# Altium PCB Adquisicion.PcbDoc
Units mm, origin at the board's own origin, x right, y up, seen from the top; angles counter-clockwise.
Board outline 77.6 x 32.51 mm, 2 copper layers (Top Layer, Bottom Layer); 30 components, 20 nets, 85 pads, 22 vias.
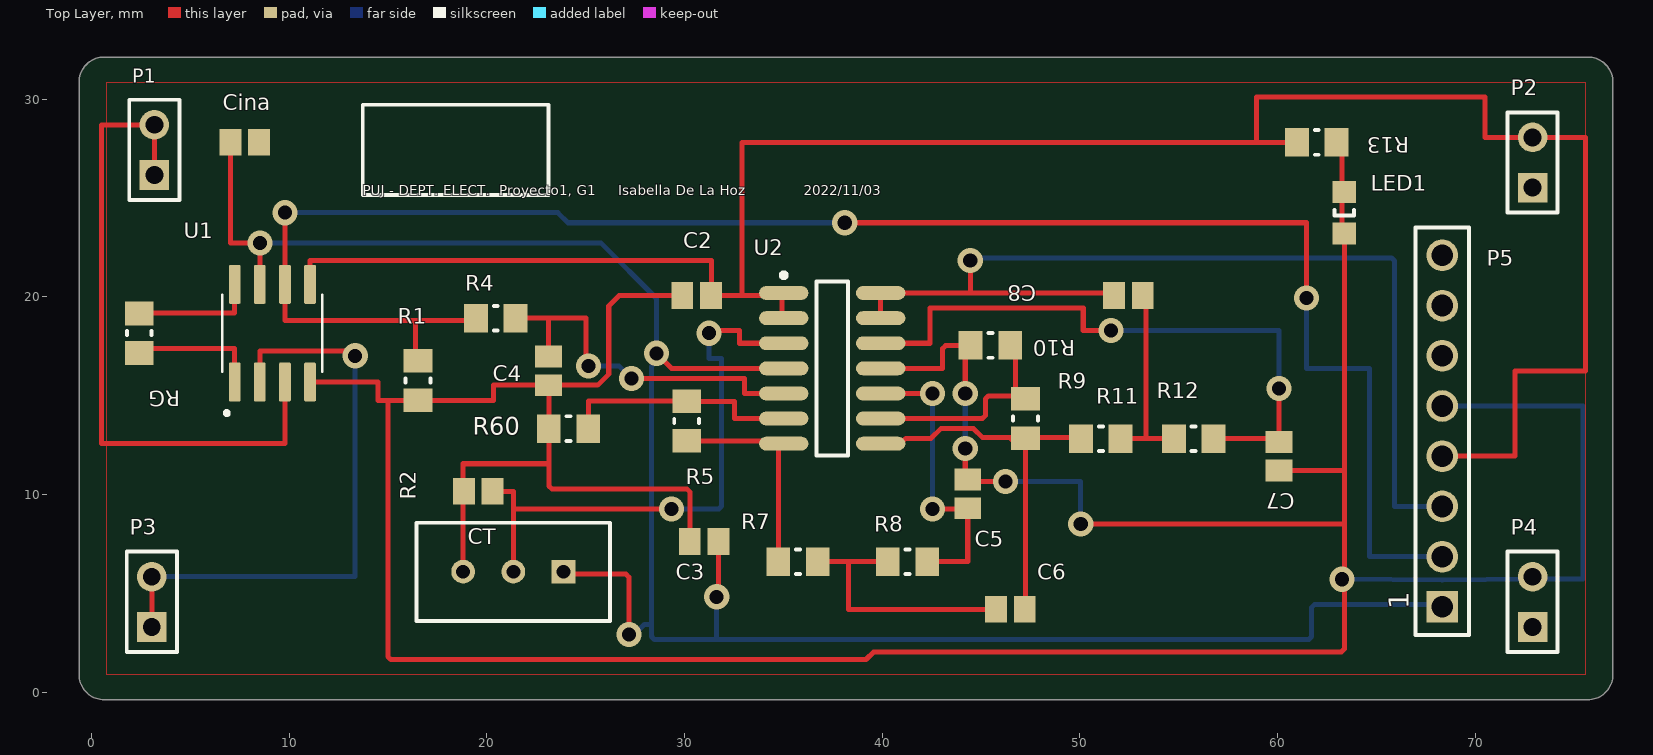
[diagram p0: Top Layer view]
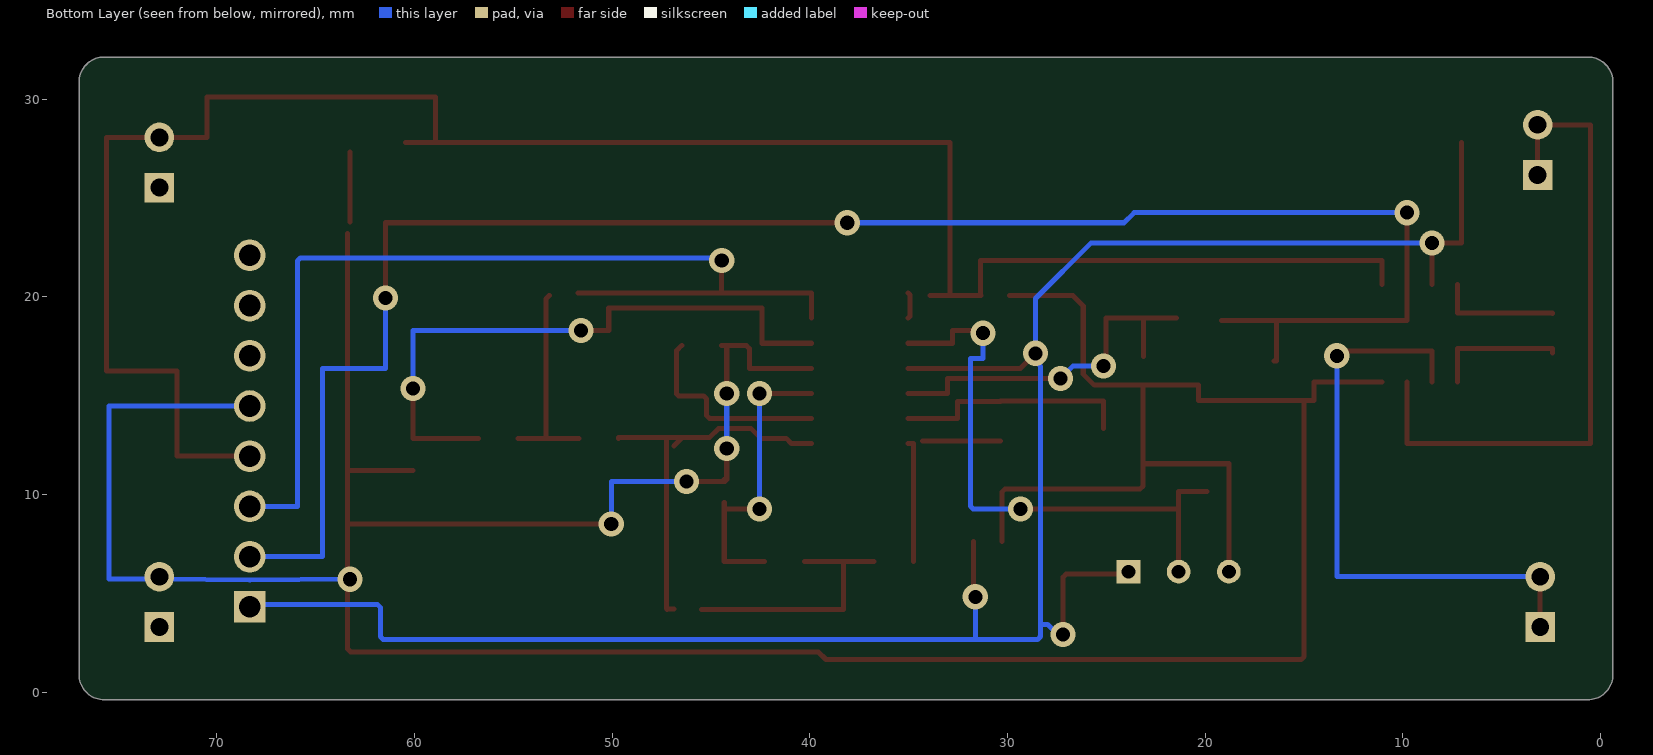
[diagram p1: Bottom Layer view, seen from below]
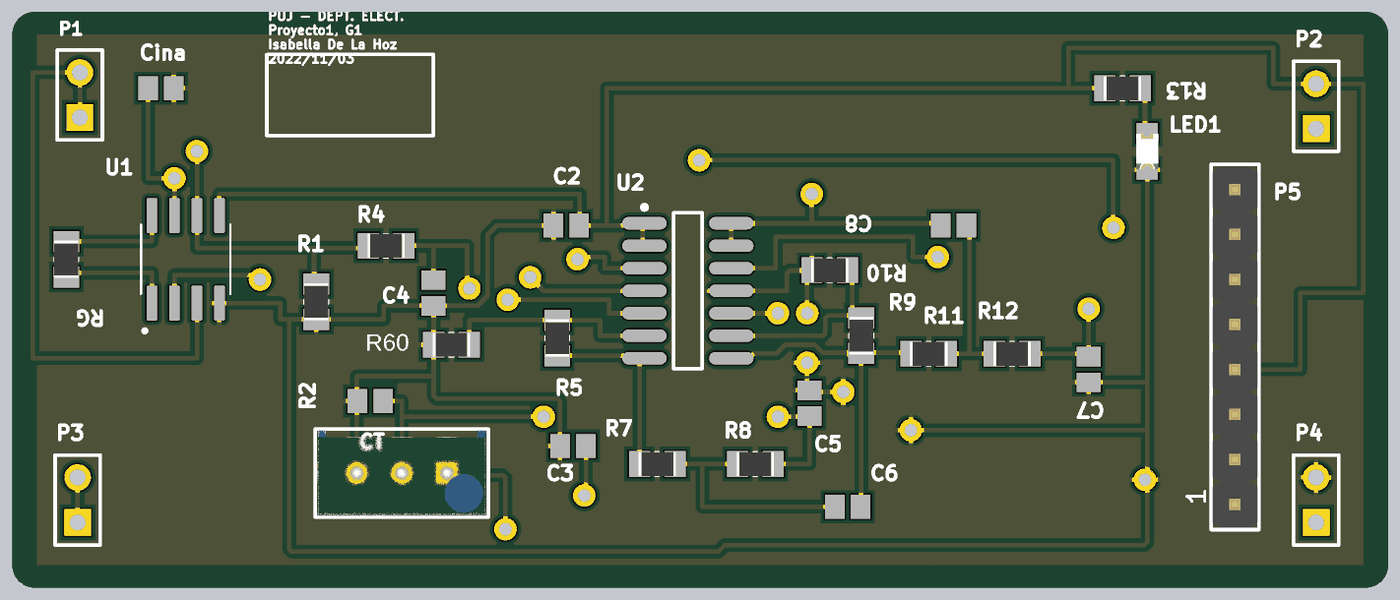
[diagram p2: 3D render of the assembled board from above, using the file's embedded part models]

## Layer stack, top to bottom
Top Solder: solder mask 0.0102, Solder Resist, Dk 3.5
Top Layer: signal copper 0.0356
Dielectric 1: dielectric 0.32, FR-4, Dk 4.8
Bottom Layer: signal copper 0.0356
Bottom Solder: solder mask 0.0102, Solder Resist, Dk 3.5

## Board outline
-0.635,0.889 -0.635,30.861 cw(c0.635,30.861) 0.635,32.131 75.692,32.131 cw(c75.692,30.861) 76.962,30.861 76.962,0.889 cw(c75.692,0.889) 75.692,-0.381 0.635,-0.381 cw(c0.635,0.889)

## Design rules (kind name [scope] priority, off if disabled: settings)
Clearance [All] p1: gap=0.254 ignorepadtopadclearanceinfootprint=FALSE except(0: Arc-Hole Track-Hole SMDPad-Hole THPad-Hole Via-Hole Fill-Hole Poly-Hole Region-Hole Text-Hole)
PolygonConnect [All] p1: connectstyle=Relief reliefconductorwidth=0.254 reliefentries=4 polygonreliefangle="90 Angle" airgapwidth=0.254
RoutingVias [All] p1: holewidth=0.711 width=1.27 viastyle="Through Hole" minholewidth=0.711 minwidth=1.27 maxholewidth=0.711 maxwidth=1.27
SolderMaskExpansion [All] p1: expansion=0.102 istentingtop=FALSE
Width [All] p1: maxlimit=0.254 minlimit=0.254 preferedwidth=0.254
30 further rules are at their usual default settings.

## Components (designator, comment, footprint, x,y, rotation, side; value= is the part's Value field where it differs from the comment)
C2 "VJ0805Y103JXBMT" CAPC2013X145X48LL20T23 30.607,20.066 r0 top
C3 "VJ0805Y103JXBMT" CAPC2013X145X48LL20T23 30.988,7.62 r0 top
C4 "VJ0805Y103JXBMT" CAPC2013X145X48LL20T23 23.114,16.256 r90 top
C5 "VJ0805Y103JXBMT" CAPC2013X145X48LL20T23 44.323,10.033 r270 top
C6 "VJ0805Y103JXBMT" CAPC2013X145X48LL20T23 46.482,4.191 r180 top
C7 "VJ0805Y103JXBMT" CAPC2013X145X48LL20T23 60.071,11.938 r270 top
C8 "VJ0805Y103JXBMT" CAPC2013X145X48LL20T23 52.451,20.066 r180 top
Cina "VJ0805Y103JXBMT" CAPC2013X145X48LL20T23 7.747,27.813 r180 top
CT "VJ0805Y103JXBMT" CAPC2013X145X48LL20T23 19.558,10.16 r0 top
LED1 "150080BS75000" 0805_A 63.373,24.255 r90 top
P1 "E+" HDR1X2 3.175,26.162 r90 top
P2 "VCC/2" HDR1X2 72.898,25.527 r90 top
P3 "VE-" HDR1X2 3.048,3.302 r90 top
P4 "Ground" HDR1X2 72.898,3.302 r90 top
P5 "61300811121" 61300811121 68.326,13.208 r90 top
R1 "RC0805JR-070RL" RESC2013X60X35ML10T20 16.51,15.764 r90 top
R2 "3296W-1-501LF" FP-3296W-MFG 21.336,6.091 r90 top
R4 "RC0805JR-070RL" RESC2013X60X35ML10T20 20.447,18.923 r0 top
R5 "RC0805JR-070RL" RESC2013X60X35ML10T20 30.099,13.716 r90 top
R7 "RC0805JR-070RL" RESC2013X60X35ML10T20 35.739,6.604 r0 top
R8 "RC0805JR-070RL" RESC2013X60X35ML10T20 41.275,6.604 r0 top
R9 "RC0805JR-070RL" RESC2013X60X35ML10T20 47.244,13.843 r90 top
R10 "RC0805JR-070RL" RESC2013X60X35ML10T20 45.466,17.545 r180 top
R11 "RC0805JR-070RL" RESC2013X60X35ML10T20 51.054,12.827 r0 top
R12 "RC0805JR-070RL" RESC2013X60X35ML10T20 55.753,12.827 r0 top
R13 "RC0805JR-070RL" RESC2013X60X35ML10T20 61.976,27.813 r180 top
R60 "RC0805JR-070RL" RESC2013X60X35ML10T20 24.13,13.335 r0 top
RG "RC0805JR-070RL" RESC2013X60X35ML10T20 2.413,18.161 r270 top
U1 "INA128U" SOIC127P599X175-8N 9.144,18.161 r90 top
U2 "MCP604-I/SL" SOIC-SL14_M 37.465,16.383 r0 top

## Footprints (in the part's own frame and the unit in brackets; to place one, negate y for a bottom-side part, rotate by r counter-clockwise, add the part's x,y. Pads: shape width x height; smd on the part's side, far side on the other; paste and mask are expansions set on the pad)
0805_A [mm] "Chip LED, 2-Leads, Body 2.0x1.3mm, IPC Medium Density"
  rect 1.1x1.2 smd: 1(-1.05,0) 2(1.05,0)
  silkscreen extent -0.15,-0.5 0.15,0.5, body extent -1,-0.62 1,0.63, height 0.68
61300811121 [mm] "Pin Header, pitch 2.54 mm, THT, Vertical, single row, 8p"
  rect 1.6x1.6 hole 1.1: 1(-8.89,0)
  round 1.6 hole 1.1: 2(-6.35,0) 3(-3.81,0) 4(-1.27,0) 5(1.27,0) 6(3.81,0) 7(6.35,0) 8(8.89,0)
  silkscreen extent -10.31,-1.35 10.31,1.35, body extent -10.16,-1.27 10.16,1.27, height 8.57
CAPC2013X145X48LL20T23 [mm] "Chip Capacitor, 2-Leads, Body 2.00x1.25mm, IPC High Density"
  rect 1.1x1.35 smd: 1(-0.725,0) 2(0.725,0)
  body extent -1.1,-0.72 1.1,0.72, height 1.45
FP-3296W-MFG [mm]
  rect 1.2x1.2 hole 0.7 paste-1000 mask+0: 1(0.005,-2.54)
  round 1.2 hole 0.7 paste-1000 mask+0: 2(0.005,0) 3(0.005,2.54)
  silkscreen extent -2.48,-4.89 2.48,4.89, body extent -2.58,-4.99 2.58,4.99, height 0.25
HDR1X2 [mm] "Connector; Header; 2 Position"
  rect 1.5x1.5 hole 0.9: 1(0,0)
  round 1.5 hole 0.9: 2(2.54,0)
  silkscreen extent -1.27,-1.27 3.81,1.27
RESC2013X60X35ML10T20 [mm] "Chip Resistor, 2-Leads, Body 2.1x1.35mm, IPC Low Density"
  rect 1.2x1.45 smd: 1(-1,0) 2(1,0)
  silkscreen extent -0.1,-0.62 0.1,0.62, body extent -1.05,-0.68 1.05,0.67, height 0.6
SOIC127P599X175-8N [mm]
  rrect25% 1.97x0.6 smd: 1(-2.47,1.905) 2(-2.47,0.635) 3(-2.47,-0.635) 4(-2.47,-1.905) 5(2.47,-1.905) 6(2.47,-0.635) 7(2.47,0.635) 8(2.47,1.905)
  silkscreen extent -4.14,-2.53 1.95,2.53
SOIC-SL14_M [mm] "SOIC, 14-Leads, Body 8.7x3.9mm, Pitch 1.27mm, IPC Low Density"
  oval 2.5x0.7 smd: 1(-2.45,3.81) 2(-2.45,2.54) 3(-2.45,1.27) 4(-2.45,0) 5(-2.45,-1.27) 6(-2.45,-2.54) 7(-2.45,-3.81) 8(2.45,-3.81) 9(2.45,-2.54) 10(2.45,-1.27) 11(2.45,0) 12(2.45,1.27) 13(2.45,2.54) 14(2.45,3.81)
  silkscreen extent -2.57,-4.4 0.8,4.83, body extent -2,-4.37 2,4.38, height 1.75

## Part data
C2 C3 C4 C5 C6 C7 C8 Cina CT: library part CMP-2007-01883-1, Manufacturer=Vitramon, Part Number=VJ0805Y103JXBMT
LED1: library part CMP-1426-00008-1, "SMD mono-color Chip LED, WL-SMCW, Blue", Color=Blue, Manufacturer="Wuerth Elektronik", ComponentLink1Description="Manufacturer URL", ComponentLink1URL=http://www.we-online.com, ComponentLink2Description=Datasheet, ComponentLink2URL=http://katalog.we-online.com/led/datasheet/150080BS75000.pdf, PackageReference=0805_A, PartNumber=150080BS75000
P1 P2 P3 P4: library part "Header 2", "Header, 2-Pin", Supplier Part Number 1=WM4111-ND, LatestRevisionDate=17-Jul-2002, LatestRevisionNote="Re-released for DXP Platform.", Publisher="Altium Limited", Supplier 1=Digi-Key
P5: library part CMP-1502-01076-1, "THT Vertical Pin Header WR-PHD, Pitch 2.54 mm, Single Row, 8 pins", Contact Resistance=20mOhm, Manufacturer="Wurth Elektronik", Operating temperature=-40to105degC, Rated Current=3A, Withstanding Voltage=500VAC, Working Voltage=250VAC, Datasheet URL=https://katalog.we-online.de/em/datasheet/6130xx11121.pdf, Gender=Male, Manufacturer URL=http://www.we-online.de, Mounting Technology=THT, Orientation=Vertical, Package Reference=61300811121, Packaging=Bag, Part Number=61300811121, Pin Number=8, Pitch=2.54mm, Publisher=WurthElektronik, Row Number=Single
R1 R4 R5 R7 R8 R9 R10 R11 R12 R13 R60 RG: library part CMP-2100-03673-1, "Chip Resistor, 0 Ohm, Jumper, +/- 5%, 0.125 W, -55 to 155 degC, 0805 (2012 Metric), RoHS, Tape and Reel", Case Code (Imperial)=0805, Case Code (Metric)=2012, Manufacturer=Yageo, Max Operating Temperature=155degC, Min Operating Temperature=-55degC, Package Description="2-Pin Surface Mounted Device, Body 2 x 1.25 mm", Power Rating=125mW, Resistance=0mOhm, Temperature Coefficient=200ppm/degreesC, Tolerance=5%, Voltage Rating=150V, Case/Package=0805, Composition=ThickFilm, Contact Plating=Tin, Datasheet URL=http://www.yageo.com/NewPortal/yageodocoutput?fileName=/pdf/R-Chip/PYu-RC_Group_51_RoHS_L_5.pdf, Datasheet Version="Rev. 5, 10/2016", Depth=1.25mm, Height=0.5mm, Lead Free=LeadFree, Length=2mm, Manufacturer URL=http://www.yageo.com/, Military Standard=Not, Number of Pins=2, Package Reference=0805, Packaging=TapeandReel, Radiation Hardening=No, REACH SVHC=Unknown, RoHSCompliant=true, Termination=SMD/SMT, Voltage Rating (DC)=150V, Width=1.25mm
R2: library part CMP-07234-000046-1, "TRIMMER 500 OHM 0.5W PC PIN TOP", Color=Blue, Max Operating Temperature=125°C, Max Power Dissipation=500mW, Min Operating Temperature=-55°C, Package Quantity=50, Resistance=500R, Resistance Tolerance=10%, Resistor Type=Cermet, Temperature Coefficient=100ppm/°C, Contact Plating=Tin, Depth=4.83mm, Height=0.395inch, Lead Free="Lead Free", Length=9.53mm, Military Standard=Not, Mount="Through Hole", Number of Turns=25, Packaging=Rail/Tube, Power Rating=500mW, Radiation Hardening=No, REACH SVHC="No SVHC", RoHS Compliant=Yes, Series=3296, Taper=Linear, Technology=CERMET, Termination=Pin, Tolerance=10%, Weight=0.03oz, Width=9.53mm
U1: "Precision, 130-dB CMRR, 700-A, Low-Power, Instrumentation Amplifier 8-SOIC", Package="SOIC-8 Burr Brown", Availability=Good, Check_prices=https://www.snapeda.com/parts/INA128U/Texas%20Instruments/view-part/631537/?ref=eda, MF=Texas, MP=INA128U, Price=None, Purchase-URL=https://pricing.snapeda.com/search/part/INA128U/?ref=eda, SnapEDA_Link=https://www.snapeda.com/parts/INA128U/Texas%20Instruments/view-part/631537/?ref=snap
U2: library part CMP-0187-00360-3, "None", Case/Package=SOIC, Input Bias Current=60pA, Input Offset Voltage (Vos)=2mV, Max Operating Temperature=85°C, Max Supply Voltage=6V, Min Operating Temperature=-40°C, Min Supply Voltage=2.7V, Nominal Supply Current=230uA, Operating Supply Voltage=5.5V, Output Current=22mA, Package Quantity=57, Power Supply Rejection Ratio (PSRR)=80dB, Voltage Gain=115dB, Amplifier Type="GENERAL PURPOSE", Bandwidth=2.8MHz, Common Mode Rejection Ratio=75dB, Gain Bandwidth Product=2.8MHz, Height=1.25mm, Input Offset Voltage-Max=2mV, Lead Free="Lead Free", Length=8.65mm, Mount="Surface Mount", Number of Amplifiers=4, Number of Channels=4, Number of Circuits=4, Number of Elements=4, Number of Pins=14, Packaging=Rail/Tube, Radiation Hardening=No, REACH SVHC="No SVHC", RoHS Compliant=Yes, Slew Rate=2.3V/µs, Slew Rate-Nom=2.3V/µs, Supply Current=230uA, Technology=CMOS, Unity Gain Bandwidth Product=2.8MHz, Width=3.9mm

## Via types
v1: diameter 1.27, hole 0.711, Top Layer to Bottom Layer, 22 vias

## Nets (pads, with @x,y where several pads share a name; then routed paths per layer and width w, separated by ;. In a path a pad name is that pad's centre, name@x,y a point inside that pad or via, vN(x,y) a via of type N, cw(c..) or ccw(c..) an arc to the next point about the centre after c; other vN are vias at no path point)
GND: C2.1 C3.1 C4.1 C5.1 C7.2 Cina.1 CT.1 LED1.1 P4.2 P5.5 R1.1 R2.3 R10.2 R60.1 U1.4 U2.11 | length 196.6
  Top Layer w0.254: U1.4 14.478,15.691 14.478,14.764 14.986,14.764 ; R2.3 18.796,11.557 23.13,11.557 ; C2.1 26.692,20.066 26.162,19.536 26.162,16.089 25.604,15.531 C4.1@23.13,15.531 ; C3.1 30.263,10.138 30.114,10.287 23.279,10.287 23.13,10.436 23.13,11.557 ; U2.11 43.053,16.383 43.053,17.38 43.202,17.529 R10.2@44.45,17.529 ; v1(44.196,15.113) R10.2@44.196,17.526 ; C5.1 C5.1@44.196,10.758 ; v1@44.323,12.319 v1(44.196,12.319) C5.1@44.196,10.758 ; v1(46.228,10.668) 44.286,10.668 C5.1@44.196,10.758 ; v1(50.038,8.509) 63.373,8.509 ; C7.2 63.373,11.213 ; v1(63.246,5.715) 63.373,5.715 63.373,8.509 ; v1@63.373,5.588 63.373,2.181 63.224,2.032 39.561,2.032 39.18,1.651 15.135,1.651 14.986,1.8 14.986,14.764 ; LED1.1 63.373,11.213 ; 14.986,14.764 R1.1 20.32,14.764 20.32,15.531 C4.1 C4.1@23.13,15.531 ; 23.13,11.557 R60.1 C4.1@23.13,15.531 ; 63.373,8.509 63.373,11.213
  Bottom Layer w0.254: v1(44.196,12.319) 44.196,14.478 ; v1(46.228,10.668) 50.038,10.668 v1(50.038,8.509) ; v1(63.246,5.715) 68.317,5.677 ccw(c68.326,6.858) 68.335,5.677 68.338,5.677 72.771,5.715 72.845,5.789 P4.2 72.898,5.715 75.438,5.715 75.438,14.478 P5.5
NetC2_2: C2.2 P2.2 P5.4 R13.2 U1.5 | length 105.5
  Top Layer w0.254: U1.5 11.049,21.844 31.369,21.844 C2.2@31.369,20.066 ; C2.2 C2.2@31.369,20.066 ; 33.909,20.066 32.893,20.066 ; R13.2@60.452,27.813 58.928,27.813 ; P5.4 72.009,11.938 72.009,16.256 75.565,16.256 75.565,28.067 P2.2 70.485,28.067 70.485,30.099 58.928,30.099 58.928,27.813 ; C2.2@31.369,20.066 32.893,20.066 ; 32.893,20.066 32.893,27.813 58.928,27.813
NetC3_2: C3.2 Cina.2 P5.1 R2.1 U1.7 U2.4 | length 107.8
  Top Layer w0.254: Cina.2 7.022,22.733 v1(8.509,22.733) U1.7 ; R2.1@24.257,5.969 27.029,5.969 27.178,5.82 v1(27.178,2.921) ; v1(28.575,17.145) 29.337,16.383 U2.4 ; v1(31.623,4.826) 31.713,4.826 C3.2
  Bottom Layer w0.254: v1(8.509,22.733) 25.759,22.733 28.575,19.917 v1(28.575,17.145) 28.381,16.951 28.381,16.548 28.321,16.488 28.321,3.429 ; v1(27.178,2.921) 27.453,2.921 27.961,3.429 28.321,3.429 ; v1(31.623,4.826) 31.623,2.667 ; P5.1@68.326,4.445 61.871,4.445 61.722,4.296 61.722,2.816 61.573,2.667 31.623,2.667 ; 28.321,3.429 28.321,2.816 28.47,2.667 31.623,2.667
NetC4_2: C4.2 R4.2 U2.5 | length 19.5
  Top Layer w0.254: R4.2 23.114,18.923 ; C4.2 23.114,18.923 ; v1@25.4,16.256 25.019,16.256 25.019,18.923 23.114,18.923 ; v1(27.305,15.875) 33.02,15.875 33.02,15.113 U2.5
  Bottom Layer w0.254: v1(25.146,16.51) 26.67,16.51 v1(27.305,15.875)
NetC5_2: C5.2 R8.2 U2.10 | length 15
  Top Layer w0.254: U2.10 v1@42.291,15.113 ; R8.2 44.323,6.604 C5.2@44.323,9.271 ; v1(42.545,9.271) C5.2@44.323,9.271 ; C5.2@44.323,9.591 C5.2 C5.2@44.323,9.271
  Bottom Layer w0.254: v1(42.545,9.271) v1(42.545,15.113)
NetC6_1: C6.1 R9.1 R11.1 U2.8 | length 19.9
  Top Layer w0.254: U2.8 40.917,12.573 41.187,12.843 42.467,12.843 42.959,13.335 44.617,13.335 45.061,12.891 46.482,12.891 47.244,12.891 49.673,12.891 R11.1@49.673,12.827 ; 46.482,12.843 R9.1@46.863,12.462 ; C6.1@46.863,4.216 47.182,4.216 C6.1 47.244,4.228 R9.1
NetC6_2: C6.2 R7.2 R8.1 | length 13.1
  Top Layer w0.254: R7.2 38.279,6.604 ; R8.1 38.279,6.604 ; C6.2@45.466,4.191 38.279,4.191 38.279,6.604
NetC7_1: C7.1 R12.2 U2.12 | length 31
  Top Layer w0.254: U2.12 42.418,17.653 42.418,19.431 50.165,19.431 50.165,18.288 v1@51.181,18.288 ; R12.2 60.071,12.827 v1(60.071,15.367)
  Bottom Layer w0.254: v1(51.562,18.288) 60.071,18.288 v1@60.071,15.83
NetC8_1: C8.1 R11.2 R12.1 | length 10.4
  Top Layer w0.254: R11.2@51.673,12.827 R11.2 53.404,12.827 ; C8.1 53.34,19.902 53.34,12.89 53.404,12.827 ; R12.1 53.404,12.827
NetC8_2: C8.2 P5.3 U2.13 U2.14 | length 50.6
  Top Layer w0.254: U2.13 U2.14 44.45,20.193 ; v1(44.45,21.844) 44.45,20.193 ; C8.2@51.726,20.193 44.45,20.193
  Bottom Layer w0.254: v1@44.958,21.971 65.764,21.971 65.838,21.897 cw(c65.659,21.717) 65.839,21.896 65.913,21.822 65.913,9.398 P5.3
NetCT_2: CT.2 R2.2 | length 5.5
  Top Layer w0.254: CT.2@19.902,10.16 21.336,10.16 R2.2
NetLED1_2: LED1.2 R13.1 | length 3.5
  Top Layer w0.254: 63.246,23.781 63.246,25.305 R13.1@63.246,27.326
NetP1_1: P1.1 P1.2 U1.3 | length 33.7
  Top Layer w0.254: P1.1 P1.2 0.508,28.702 0.508,12.573 9.779,12.573 U1.3
NetP3_1: P3.1 P3.2 U1.2 | length 30.2
  Top Layer w0.254: P3.1 P3.2 ; U1.2 8.509,17.272 13.335,17.272 v1(13.335,17.018)
  Bottom Layer w0.254: P3.2 13.335,5.842 v1@13.335,16.51
NetP5_2: P5.2 R1.2 R4.1 U1.6 | length 92.2
  Top Layer w0.254: v1(9.779,24.257) U1.6 9.779,18.796 16.383,18.796 ; R1.2 16.383,16.764 16.383,18.796 ; R4.1@19.177,18.796 16.383,18.796 ; v1@38.354,23.749 61.468,23.749 v1(61.468,19.939)
  Bottom Layer w0.254: v1(9.779,24.257) 23.588,24.257 24.096,23.749 v1(38.1,23.749) ; v1@61.468,19.685 61.468,16.383 64.643,16.383 64.643,6.858 P5.2
NetR5_1: R5.1 R7.1 U2.7 | length 10.2
  Top Layer w0.254: R5.1@30.353,12.716 U2.7@34.29,12.716 ; R7.1 34.739,12.573 U2.7
NetR5_2: R5.2 R60.2 U2.6 | length 12.2
  Top Layer w0.254: R60.2 25.146,13.335 25.146,14.732 30.353,14.732 30.353,14.716 32.512,14.716 32.512,13.843 U2.6
NetR9_2: R9.2 R10.1 U2.9 | length 10.4
  Top Layer w0.254: U2.9 45.063,13.843 45.212,13.992 45.212,14.837 45.361,14.986 46.625,14.986 46.736,15.097 46.736,17.275 R10.1
NetRG_1: RG.1 U1.8 | length 6.3
  Top Layer w0.254: RG.1 2.429,19.177 7.239,19.177 U1.8
NetRG_2: RG.2 U1.1 | length 6.8
  Top Layer w0.254: RG.2 2.413,17.399 7.239,17.399 U1.1
pads on no net: P2.1 P4.1 P5.6 P5.7 P5.8 U2.1 U2.2 U2.3
copper on no net: | length 24.7
  Top Layer w0.254: 21.336,9.271 v1(29.337,9.271) ; v1@31.75,18.288 32.766,18.288 32.766,17.653 35.015,17.653 ; 35.015,18.923 34.925,19.013 34.925,20.103 35.015,20.193
  Bottom Layer w0.254: v1@29.825,9.271 31.728,9.271 31.877,9.42 31.877,16.891 31.242,16.891 v1(31.242,18.161)

## Polygon pours and split planes (outlines as drawn)
GND on Top Layer "NONET_L01_P000" (solid, shelved, pour order 0): 0.762,30.861 75.565,30.861 75.565,0.889 0.762,0.889

## Silkscreen, mask and mechanical layers (free items; w line width, h text height)
Top Overlay:
  lines w0.2: 13.716,25.146 23.114,25.146 23.114,29.718 13.716,29.718 13.716,25.146
  text "PUJ - DEPT. ELECT.  Proyecto1, G1     Isabella De La Hoz             2022/11/03" at 13.716,25.146 h0.5
Mechanical 1:
  lines w0.254: -0.635,30.861 cw(c0.635,30.861) 0.635,32.131 75.635,32.131 ; -0.635,30.889 -0.635,0.889 ccw(c0.635,0.889) 0.635,-0.381 75.635,-0.381 ; 75.692,-0.381 ccw(c75.692,0.889) 76.962,0.889 76.962,30.889 ; 75.692,32.131 cw(c75.692,30.861) 76.962,30.861

## Text inside footprints (layer, text, board x,y; h text height)
P5: Top Overlay "1" at 66.626,4.198 h1.02 r90